# EAGLE board strain-gauge-amplifier-v1 (EAGLE 6.4)
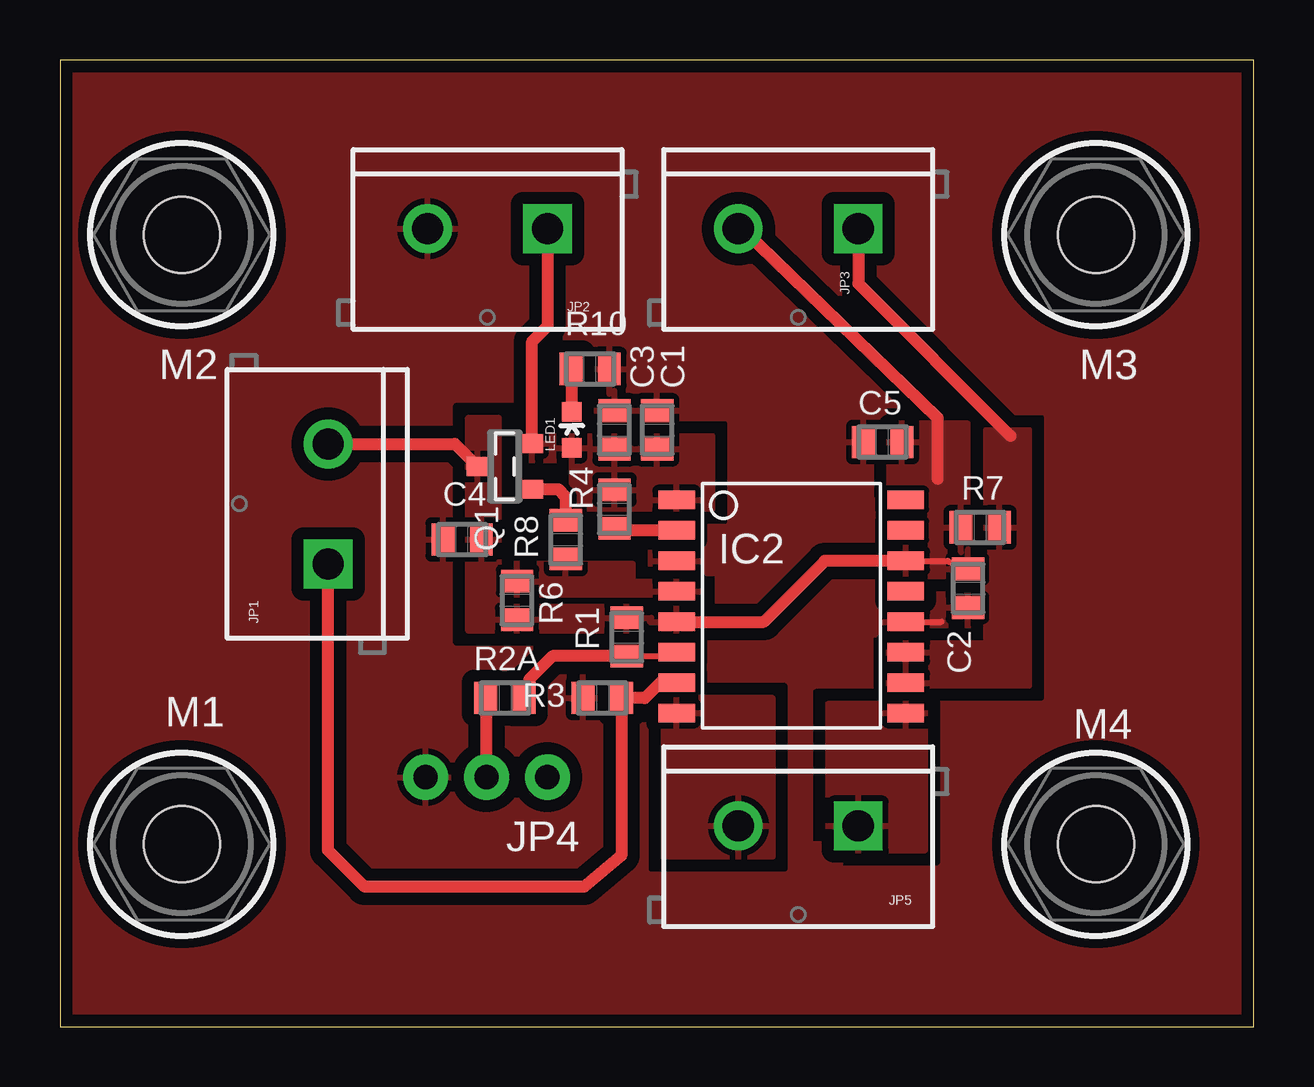
[diagram p0: board, top side]
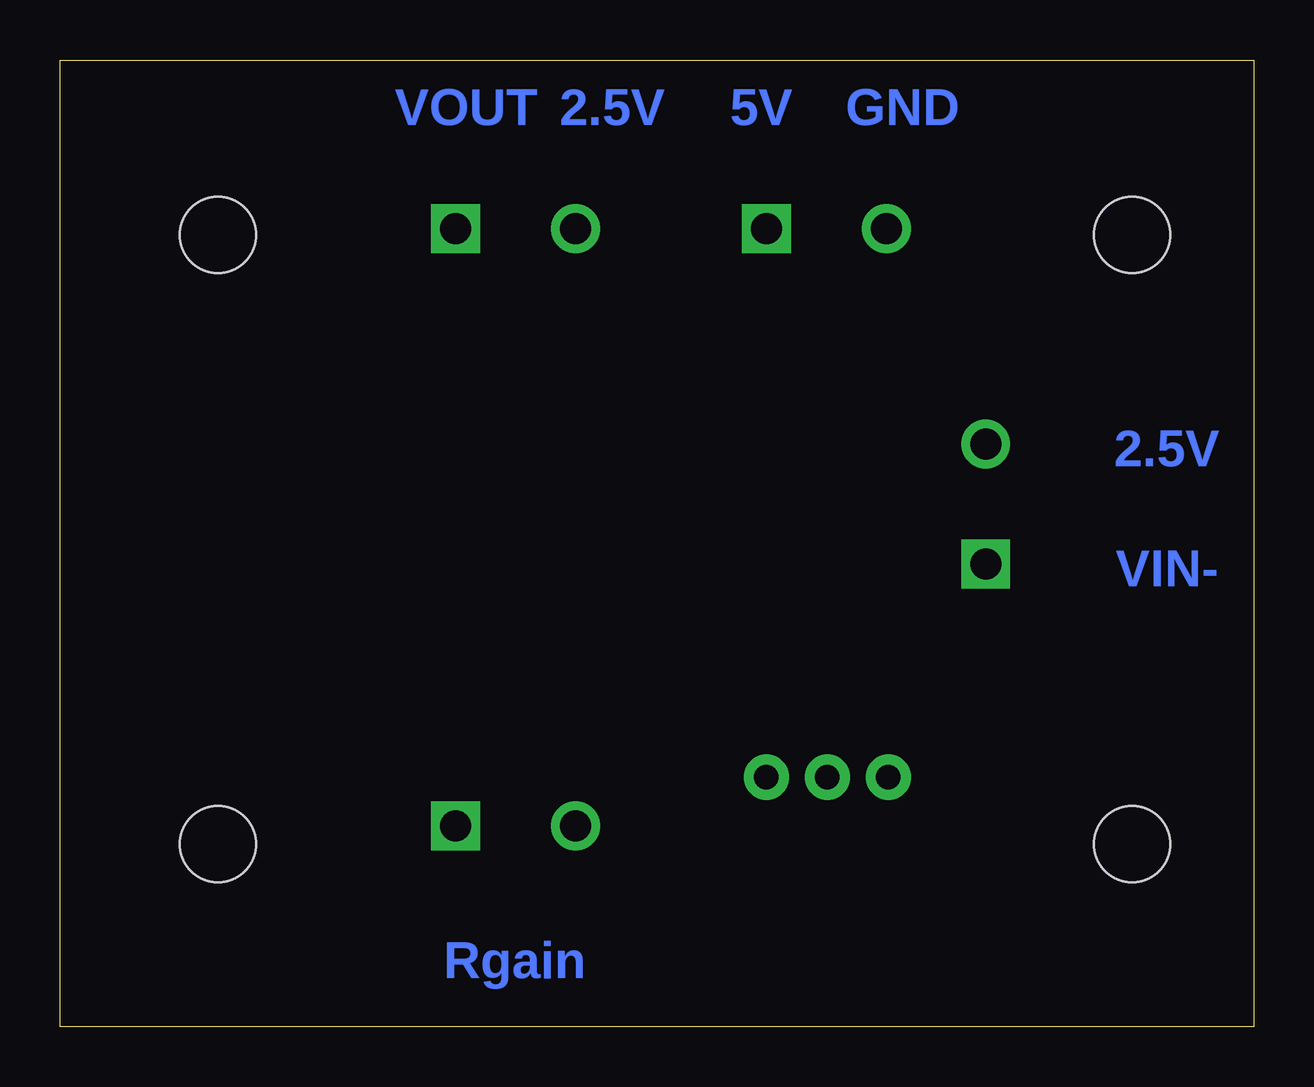
[diagram p1: board, bottom side, seen from below]

Size 49.76 x 40.31 mm. Coordinates in mm from the lower left corner, seen from the top.
Outline: 0,0 49.76,0 49.76,40.31 0,40.31 0,0
Copper layers (1*16): Top 0.0178mm / dielectric 59mil / Bottom 0.0178mm
Design rules "epl-lpkf": minimum track width 8mil, minimum drill 0.35mm, track to track 8mil, track to pad 8mil, pad to pad 8mil, via to via 8mil, smd to smd 8mil, copper to edge 15mil, drill to drill 15mil, minimum pad ring 8mil, minimum via ring 8mil, stop-mask expansion 3mil, vias tented up to drill 0mil, thermal gap 10mil

## Footprints (pad centres in the part's own frame; a part is rotated, then mirrored left to right if it is on the bottom)
0805-C-NOSILK = smd 0.95 x 1.35: 1 -0.8,0; 2 0.8,0
SO16-1 = smd 0.762 x 1.524: 1 -4.445,-4.775; 2 -3.175,-4.775; 3 -1.905,-4.775; 4 -0.635,-4.775; 5 0.635,-4.775; 6 1.905,-4.775; 7 3.175,-4.775; 8 4.445,-4.775; 9 4.445,4.775; 10 3.175,4.775; 11 1.905,4.775; 12 0.635,4.775; 13 -0.635,4.775; 14 -1.905,4.775; 15 -3.175,4.775; 16 -4.445,4.775
SCREWTERMINAL-5MM-2 = drill 1.3 pad 2.032 square: 1 0,0 | drill 1.3 pad 2.032: 2 5,0
1X03_NO_SILK = drill 1.016 pad 1.88: 1 0,0; 2 2.54,0; 3 5.08,0
LED-0603 = smd 0.8 x 0.8: A 0,-0.75; C 0,0.75
#4/.300-BARE+STD_NUT_OR_STAR_WASHER = hole 3.175: 0,0
SOT23 = smd 0.787 x 0.889: 1 -0.953,-1.143; 2 0.953,-1.143; 3 0,1.143

## Placement (x,y rotation side)
C1  1uF  [0805-C-NOSILK]  24.89,24.89 90 top
C2  100n  [0805-C-NOSILK]  37.85,18.29 270 top
C3  100n  [0805-C-NOSILK]  23.11,24.89 90 top
C4  100n  [0805-C-NOSILK]  16.76,20.32 180 top
C5  100n  [0805-C-NOSILK]  34.29,24.38 180 top
IC2  INA125U  [SO16-1]  30.48,17.53 270 top
JP1  STRAIN  [SCREWTERMINAL-5MM-2]  11.18,19.3 90 top
JP2  [SCREWTERMINAL-5MM-2]  20.32,33.27 180 top
JP3  [SCREWTERMINAL-5MM-2]  33.27,33.27 180 top
JP4  50ohm/20turn  [1X03_NO_SILK]  20.32,10.41 180 top
JP5  Rg  [SCREWTERMINAL-5MM-2]  33.27,8.38 180 top
LED1  2.1V/20mA  [LED-0603]  21.34,24.89 0 top
M1  #4-BARE_MOUNTING_HOLE/.300  [#4/.300-BARE+STD_NUT_OR_STAR_WASHER]  5.08,7.62 0 top
M2  #4-BARE_MOUNTING_HOLE/.300  [#4/.300-BARE+STD_NUT_OR_STAR_WASHER]  5.08,33.02 0 top
M3  #4-BARE_MOUNTING_HOLE/.300  [#4/.300-BARE+STD_NUT_OR_STAR_WASHER]  43.18,33.02 0 top
M4  #4-BARE_MOUNTING_HOLE/.300  [#4/.300-BARE+STD_NUT_OR_STAR_WASHER]  43.18,7.62 0 top
Q1  PMV45EN  [SOT23]  18.54,23.37 90 top
R1  120  [0805-C-NOSILK]  23.62,16.26 90 top
R2A  100  [0805-C-NOSILK]  18.54,13.72 0 top
R3  120  [0805-C-NOSILK]  22.61,13.72 0 top
R4  1k  [0805-C-NOSILK]  23.11,21.59 90 top
R6  NP (0)  [0805-C-NOSILK]  19.05,17.78 270 top
R7  NP (10k)  [0805-C-NOSILK]  38.35,20.83 0 top
R8  100  [0805-C-NOSILK]  21.08,20.32 90 top
R10  1k  [0805-C-NOSILK]  22.1,27.43 180 top

## Library data of the parts
C1-C5 R1 R2A R3 R4 R6-R8 R10 = rcl_custom
IC2 = burr-brown; MF: TEXAS INSTRUMENT CONNECTORS; MPN: INA125U; OC_FARNELL: 1304375; OC_NEWARK: 80K5901
JP1-JP5 = SparkFun-Connectors
LED1 = SparkFun-LED
M1-M4 = mount
Q1 = Q_PMV45EN_N_ch_MOSFET

## Nets
2.5VREF: C2.1 C4.1 C5.1 IC2.5 IC2.14 JP1.2 JP3.2 Q1.3 R1.2 R6.2 R7.1
5V: C1.1 C3.1 IC2.1 JP2.1 LED1.A Q1.2 R4.2
GND: C1.2 C2.2 C3.2 C4.2 C5.2 IC2.3 IC2.12 JP2.2 JP4.3 R3.1 R10.1
N$1: JP4.2 R2A.1
N$3: IC2.9 JP5.1
N$5: IC2.8 JP5.2
N$6: Q1.1 R8.2
N$8: IC2.2 R4.1
N$11: LED1.C R10.2
VIN+: IC2.6 R1.1 R2A.2
VIN-: IC2.7 JP1.1 R3.2
VOUT: IC2.10 IC2.11 JP3.1 R7.2
VREFOUT: IC2.4 R6.1 R8.1

## Tracks (layer width: path | path; a pad name or v marks a point on that pad's centre or on a via)
2.5VREF
  Top 0.254: IC2.14 36.99,19.43 C2.1
  Top 0.508: IC2.14 31.88,19.43 29.34,16.89 IC2.5 | JP3.2 28.45,33.27 36.58,25.4 36.58,22.86 | JP1.2 16.46,24.3 Q1.3
  pour Top: 26.67,16.51 17.02,16.51 17.02,25.4 18.29,25.4 18.29,17.53 26.67,17.53
  pour Top (rank 2): 34.54,18.8 37.85,18.8 37.85,25.15 34.54,25.15
5V
  Top 0.508: JP2.1 20.32,29.21 19.68,28.57 Q1.2
  pour Top: 19.3,24.64 27.18,24.64 27.18,21.59 21.34,21.59 21.34,23.62 19.3,23.62
GND
  Top 0.254: IC2.12 36.74,16.89
  pour Top (isolate 0.508, rank 5): 0,40.13 49.78,40.39 49.78,0 0,0
N$1
  Top 0.508: JP4.2 17.78,13.68 R2A.1
N$3
  pour Top: 36.07,13.46 32,13.46 32,7.37 36.07,7.37
N$5
  pour Top: 29.72,13.72 25.15,13.72 25.15,7.11 29.72,7.11
N$6
  Top 0.508: Q1.1 20.77,22.42 21.08,22.1 R8.2
N$8
  Top 0.508: IC2.2 23.2,20.7 R4.1
N$11
  Top 0.254: 21.34,27.39 R10.2
  Top 0.508: LED1.C 21.34,27.39
VIN+
  Top 0.254: R1.1 25.54,15.46 IC2.6
  Top 0.508: R1.1 20.54,15.46 19.56,14.48 19.56,13.93 R2A.2
VIN-
  Top 0.508: IC2.7 25.02,14.35 24.38,13.72 R3.2 23.41,7.15 21.84,5.84 12.7,5.84 11.18,7.37 JP1.1
VOUT
  Top 0.508: JP3.1 33.27,30.99 39.62,24.64
  pour Top: 40.39,24.89 40.39,14.22 34.54,14.22 34.54,16 38.61,16 38.61,24.89
VREFOUT
  pour Top (rank 2): 26.67,18.54 23.88,18.54 23.88,19.3 18.29,19.3 18.29,18.03 26.67,18.03

## Text on the board
Bottom: GND | 5V | 2.5V | VOUT | 2.5V | VIN- | Rgain